# Altium PCB PCB1.PcbDoc (part 2 of 2)
Units mil, origin at the board's own origin, x right, y up, seen from the top; angles counter-clockwise.
Board outline 2495 x 1003.43 mil, 4 copper layers (Top Layer, GND, 3.3V, Bottom Layer), stack 61.581 mil thick; 64 components, 69 nets, 245 pads, 37 vias.
Unrouted connection lines stored in the file: 4.
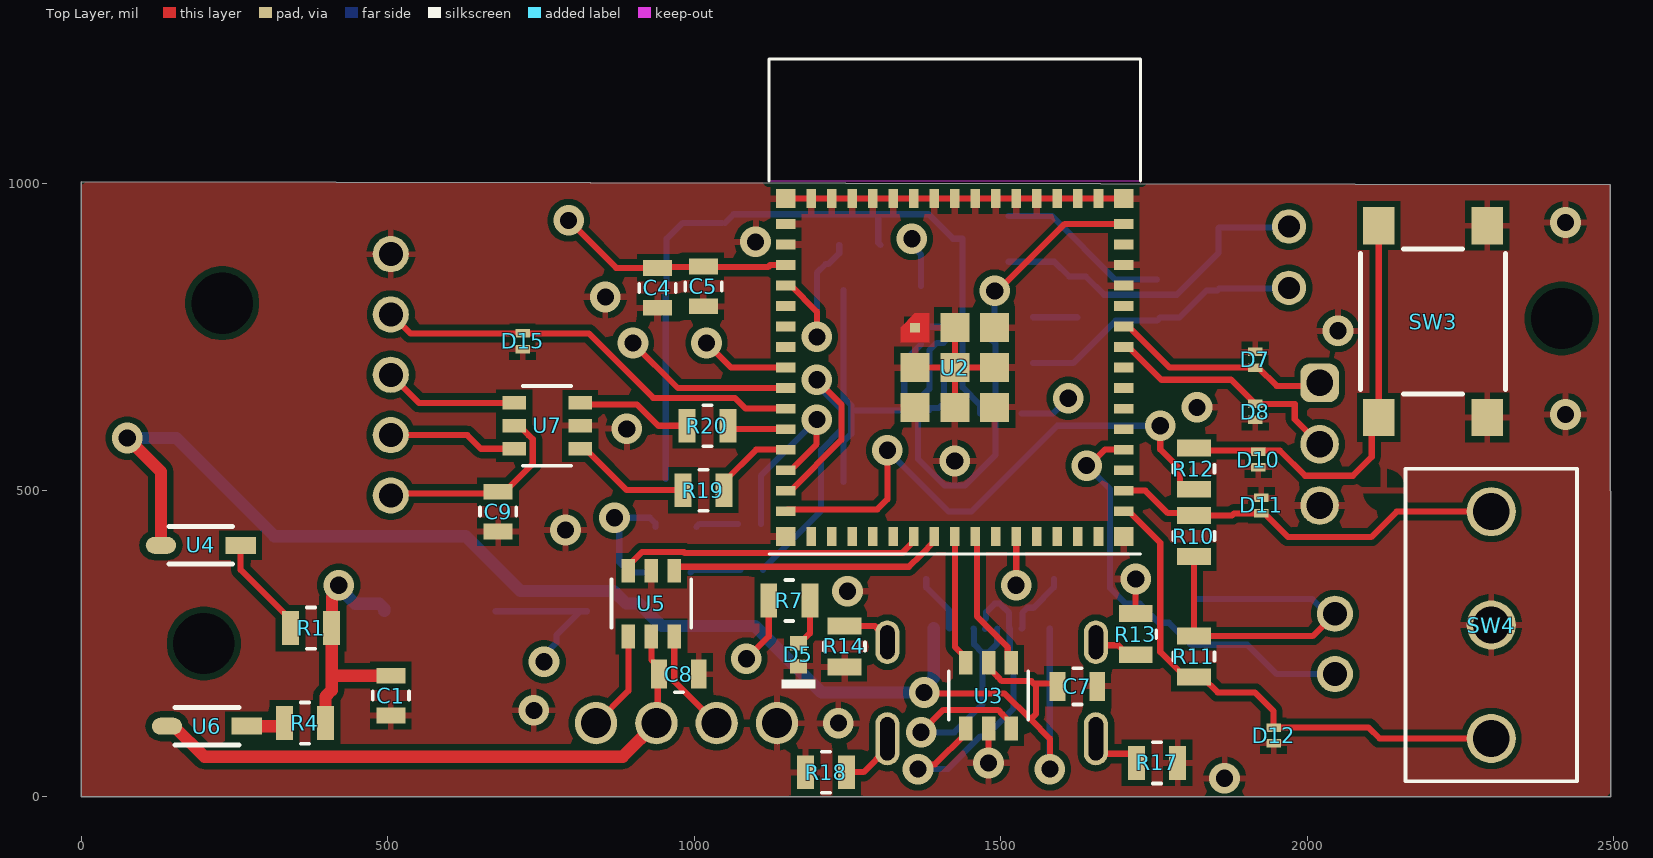
[diagram p0: Top Layer view]

## Part data (continued)
R1 R4 R8 R19 R20: library part RC0805JR-070RL, "GENERAL PURPOSE CHIP RESISTOR Metal Glaze/thick Film, 0.125W, 0ohm, Surface Mount, 0805", Case Code (Imperial)=0805, Manufacturer="Yageo Group", Max Operating Temperature=155°C, Min Operating Temperature=-55°C, Power Dissipation=125mW, Supplier Part Number=311-0.0ARDKR-ND, Temperature Coefficient=300ppm/°C, Tolerance=5%, Voltage Rating=150V, Case/Package=0805, Category="Chip SMD Resistors", China RoHS=Non-Compliant, ComponentLink1Description=https://datasheet.octopart.com:443/RC0805JR-070RL-Yageo-datasheet-182189538.pdf?src-supplier=IHS, ComponentLink1URL=https://datasheet.octopart.com:443/RC0805JR-070RL-Yageo-datasheet-182189538.pdf?src-supplier=IHS, ComponentLink2Description=https://datasheet.octopart.com:443/RC0805JR-070RL-Yageo-datasheet-103092701.pdf?src-supplier=Upverter, ComponentLink2URL=https://datasheet.octopart.com:443/RC0805JR-070RL-Yageo-datasheet-103092701.pdf?src-supplier=Upverter, ComponentLink3Description=https://datasheet.octopart.com:443/RC0805JR-070RL-Yageo-datasheet-98239111.pdf?src-supplier=Upverter, ComponentLink3URL=https://datasheet.octopart.com:443/RC0805JR-070RL-Yageo-datasheet-98239111.pdf?src-supplier=Upverter, ComponentLink4Description=https://datasheet.octopart.com:443/RC0805JR-070RL-Yageo-datasheet-8330313.pdf?src-supplier=Newark, ComponentLink4URL=https://datasheet.octopart.com:443/RC0805JR-070RL-Yageo-datasheet-8330313.pdf?src-supplier=Newark, ComponentLink5Description=https://datasheet.octopart.com:443/RC0805JR-070RL-Yageo-datasheet-8327506.pdf?src-supplier=Newark, ComponentLink5URL=https://datasheet.octopart.com:443/RC0805JR-070RL-Yageo-datasheet-8327506.pdf?src-supplier=Newark, ComponentLink6Description=https://datasheet.octopart.com:443/RC0805JR-070RL-Yageo-datasheet-62067350.pdf?src-supplier=element14+APAC, ComponentLink6URL=https://datasheet.octopart.com:443/RC0805JR-070RL-Yageo-datasheet-62067350.pdf?src-supplier=element14+APAC, ComponentLink7Description=https://datasheet.octopart.com:443/RC0805JR-070RL-Yageo-datasheet-17879891.pdf?src-supplier=element14+APAC, ComponentLink7URL=https://datasheet.octopart.com:443/RC0805JR-070RL-Yageo-datasheet-17879891.pdf?src-supplier=element14+APAC, ComponentLink8Description=https://datasheet.octopart.com:443/RC0805JR-070RL-Yageo-Group-datasheet-176638170.pdf?src-supplier=Future+Electronics, ComponentLink8URL=https://datasheet.octopart.com:443/RC0805JR-070RL-Yageo-Group-datasheet-176638170.pdf?src-supplier=Future+Electronics, ComponentLink9Description=https://datasheet.octopart.com:443/RC0805JR-070RL-Yageo-datasheet-164759695.pdf?src-supplier=Future+Electronics, ComponentLink9URL=https://datasheet.octopart.com:443/RC0805JR-070RL-Yageo-datasheet-164759695.pdf?src-supplier=Future+Electronics, ComponentLink10Description=https://datasheet.octopart.com:443/RC0805JR-070RL-Yageo-datasheet-15800360.pdf?src-supplier=Future+Electronics, ComponentLink10URL=https://datasheet.octopart.com:443/RC0805JR-070RL-Yageo-datasheet-15800360.pdf?src-supplier=Future+Electronics, ComponentLink11Description=https://datasheet.octopart.com:443/RC0805JR-070RL-Yageo-datasheet-12592811.pdf?src-supplier=Future+Electronics, ComponentLink11URL=https://datasheet.octopart.com:443/RC0805JR-070RL-Yageo-datasheet-12592811.pdf?src-supplier=Future+Electronics, ComponentLink12Description=https://datasheet.octopart.com:443/RC0805JR-070RL-Yageo-datasheet-8324252.pdf?src-supplier=Future+Electronics, ComponentLink12URL=https://datasheet.octopart.com:443/RC0805JR-070RL-Yageo-datasheet-8324252.pdf?src-supplier=Future+Electronics, ComponentLink13Description=https://datasheet.octopart.com:443/RC0805JR-070RL-Yageo-datasheet-79472498.pdf?src-supplier=Megastar, ComponentLink13URL=https://datasheet.octopart.com:443/RC0805JR-070RL-Yageo-datasheet-79472498.pdf?src-supplier=Megastar, ComponentLink14Description=https://datasheet.octopart.com/RC0805JR-070RL-Yageo-datasheet-73766026.pdf, ComponentLink14URL=https://datasheet.octopart.com/RC0805JR-070RL-Yageo-datasheet-73766026.pdf, ComponentLink15Description=https://datasheet.octopart.com:443/RC0805JR-070RL-Yageo-datasheet-8377918.pdf?src-supplier=Farnell, ComponentLink15URL=https://datasheet.octopart.com:443/RC0805JR-070RL-Yageo-datasheet-8377918.pdf?src-supplier=Farnell, ComponentLink16Description=https://datasheet.octopart.com:443/RC0805JR-070RL-Yageo-datasheet-118657.pdf?src-supplier=DigiKey, ComponentLink16URL=https://datasheet.octopart.com:443/RC0805JR-070RL-Yageo-datasheet-118657.pdf?src-supplier=DigiKey, ComponentLink17Description=http://sigma.octopart.com:80/conflict_mineral_statement/Yageo-company-3.pdf?src-supplier=Compliance+Statements, ComponentLink17URL=http://sigma.octopart.com:80/conflict_mineral_statement/Yageo-company-3.pdf?src-supplier=Compliance+Statements, ComponentLink18Description=http://sigma.octopart.com:80/rohs_statement/Yageo-company-2.pdf?src-supplier=Compliance+Statements, ComponentLink18URL=http://sigma.octopart.com:80/rohs_statement/Yageo-company-2.pdf?src-supplier=Compliance+Statements, Composition="Thick Film", Contact Plating=Tin, Depth=1.25mm, Height=500µm, Lead Free="Lead Free", Length=2mm, Lifecycle Status=Production, Manufacturer Part Number=RC0805JR-070RL, Military Standard=Not, Mounting Technology="Surface Mount", Number of Terminals=2, Packaging="Tape & Reel", Pins=2, Power Rating=125mW, Pricing="1=0.1, 10=0.015, 25=0.0128, 50=0.011, 100=0.0097, 250=0.00812, 500=0.00716, 1000=0.00633 (USD)", Radiation Hardening=No, REACH SVHC=Yes, RoHS=Compliant, Schedule B="8533290000, 8533290000|8533290000, 8533290000|8533290000|8533290000, 8533290000|8533290000|8533290000|8533290000", Stock=1260777, Supplier=DigiKey, Termination=SMD/SMT, Voltage Rating (DC)=150V, Width=1.25mm
R2 R3 R7: library part RG2012P-102-B-T5, "Res Thin Film 0805 1K Ohm 0.1% 0.125W(1/8W) ±25ppm/C Sulfur Resistant Pad SMD Automotive T/R", Case Code (Imperial)=0805, Case Code (Metric)=2012, Manufacturer=Susumu, Max Operating Temperature=155°C, Max Power Dissipation=125mW, Min Operating Temperature=-55°C, Supplier Part Number=RG20P1.0KBCT-ND, Temperature Coefficient=25ppm/°C, Tolerance=0.1%, Voltage Rating=150V, Case/Package=0805, Category="Chip SMD Resistors", ComponentLink1Description=https://datasheet.octopart.com:443/RG2012P-102-B-T5-Susumu-datasheet-182148308.pdf?src-supplier=IHS, ComponentLink1URL=https://datasheet.octopart.com:443/RG2012P-102-B-T5-Susumu-datasheet-182148308.pdf?src-supplier=IHS, ComponentLink2Description=https://datasheet.octopart.com:443/RG2012P-102-B-T5-Susumu-datasheet-104167497.pdf?src-supplier=Upverter, ComponentLink2URL=https://datasheet.octopart.com:443/RG2012P-102-B-T5-Susumu-datasheet-104167497.pdf?src-supplier=Upverter, ComponentLink3Description=https://datasheet.octopart.com:443/RG2012P-102-B-T5-Susumu-datasheet-62085167.pdf?src-supplier=Upverter, ComponentLink3URL=https://datasheet.octopart.com:443/RG2012P-102-B-T5-Susumu-datasheet-62085167.pdf?src-supplier=Upverter, ComponentLink4Description=https://datasheet.octopart.com/RG2012P-102-B-T5-Susumu-datasheet-12509734.pdf, ComponentLink4URL=https://datasheet.octopart.com/RG2012P-102-B-T5-Susumu-datasheet-12509734.pdf, ComponentLink5Description=https://datasheet.octopart.com:443/RG2012P-102-B-T5-Susumu-datasheet-12510102.pdf?src-supplier=Future+Electronics, ComponentLink5URL=https://datasheet.octopart.com:443/RG2012P-102-B-T5-Susumu-datasheet-12510102.pdf?src-supplier=Future+Electronics, ComponentLink6Description=https://datasheet.octopart.com:443/RG2012P-102-B-T5-Susumu-datasheet-12510050.pdf?src-supplier=Future+Electronics, ComponentLink6URL=https://datasheet.octopart.com:443/RG2012P-102-B-T5-Susumu-datasheet-12510050.pdf?src-supplier=Future+Electronics, ComponentLink7Description=https://datasheet.octopart.com:443/RG2012P-102-B-T5-Susumu-datasheet-8324184.pdf?src-supplier=Future+Electronics, ComponentLink7URL=https://datasheet.octopart.com:443/RG2012P-102-B-T5-Susumu-datasheet-8324184.pdf?src-supplier=Future+Electronics, ComponentLink8Description=https://datasheet.octopart.com:443/RG2012P-102-B-T5-Susumu-datasheet-118552.pdf?src-supplier=DigiKey, ComponentLink8URL=https://datasheet.octopart.com:443/RG2012P-102-B-T5-Susumu-datasheet-118552.pdf?src-supplier=DigiKey, Composition="Thin Film", Country of Origin="Mainland China, Japan", Export Control Classification Number (ECCN) Code=EAR99, Features="Automotive AEC-Q200", Harmonized Tariff Schedule (HTS) Code=8533.21.00.30, Height=400µm, Introduction Date=2006-03-30, Lead Free="Lead Free", Length=2.0066mm, Lifecycle Status=Production, Manufacturer Part Number=RG2012P-102-B-T5, Mounting Technology="Surface Mount", Number of Terminals=2, Number of Terminations=2, Power Dissipation=125mW, Power Rating=125mW, Pricing="1=0.1, 10=0.069, 25=0.0644, 50=0.0608, 100=0.0574, 250=0.05324, 500=0.05038, 1000=0.04774 (USD)", REACH SVHC=Yes, RoHS=Compliant, Stock=185368, Supplier=DigiKey, Termination=SMD/SMT, Voltage Rating (DC)=150V, Width=1.25mm, Working Voltage=150V
R5 R6 R9 R10 R11 R21: library part RG2012P-103-B-T5, "Res Thin Film 0805 10K Ohm 0.1% 0.125W(1/8W) ±25ppm/C Sulfur Resistant Pad SMD Automotive T/R", Case Code (Imperial)=0805, Case Code (Metric)=2012, Manufacturer=Susumu, Max Operating Temperature=155°C, Min Operating Temperature=-55°C, Power Dissipation=125mW, Supplier Part Number=RG20P10.0KBCT-ND, Temperature Coefficient=25ppm/°C, Tolerance=0.1%, Voltage Rating=150V, Case/Package=0805, Category="Chip SMD Resistors", ComponentLink1Description=https://datasheet.octopart.com:443/RG2012P-103-B-T5-Susumu-datasheet-182148308.pdf?src-supplier=IHS, ComponentLink1URL=https://datasheet.octopart.com:443/RG2012P-103-B-T5-Susumu-datasheet-182148308.pdf?src-supplier=IHS, ComponentLink2Description=https://datasheet.octopart.com:443/RG2012P-103-B-T5-Susumu-datasheet-104167497.pdf?src-supplier=Upverter, ComponentLink2URL=https://datasheet.octopart.com:443/RG2012P-103-B-T5-Susumu-datasheet-104167497.pdf?src-supplier=Upverter, ComponentLink3Description=https://datasheet.octopart.com:443/RG2012P-103-B-T5-Susumu-datasheet-62085167.pdf?src-supplier=Upverter, ComponentLink3URL=https://datasheet.octopart.com:443/RG2012P-103-B-T5-Susumu-datasheet-62085167.pdf?src-supplier=Upverter, ComponentLink4Description=https://datasheet.octopart.com/RG2012P-103-B-T5-Susumu-datasheet-12509734.pdf, ComponentLink4URL=https://datasheet.octopart.com/RG2012P-103-B-T5-Susumu-datasheet-12509734.pdf, ComponentLink5Description=https://datasheet.octopart.com:443/RG2012P-103-B-T5-Susumu-datasheet-80324142.pdf?src-supplier=LKR, ComponentLink5URL=https://datasheet.octopart.com:443/RG2012P-103-B-T5-Susumu-datasheet-80324142.pdf?src-supplier=LKR, ComponentLink6Description=https://datasheet.octopart.com:443/RG2012P-103-B-T5-Susumu-datasheet-12510102.pdf?src-supplier=Future+Electronics, ComponentLink6URL=https://datasheet.octopart.com:443/RG2012P-103-B-T5-Susumu-datasheet-12510102.pdf?src-supplier=Future+Electronics, ComponentLink7Description=https://datasheet.octopart.com:443/RG2012P-103-B-T5-Susumu-datasheet-12510050.pdf?src-supplier=Future+Electronics, ComponentLink7URL=https://datasheet.octopart.com:443/RG2012P-103-B-T5-Susumu-datasheet-12510050.pdf?src-supplier=Future+Electronics, ComponentLink8Description=https://datasheet.octopart.com:443/RG2012P-103-B-T5-Susumu-datasheet-8324184.pdf?src-supplier=Future+Electronics, ComponentLink8URL=https://datasheet.octopart.com:443/RG2012P-103-B-T5-Susumu-datasheet-8324184.pdf?src-supplier=Future+Electronics, ComponentLink9Description=https://datasheet.octopart.com:443/RG2012P-103-B-T5-Susumu-datasheet-118552.pdf?src-supplier=DigiKey, ComponentLink9URL=https://datasheet.octopart.com:443/RG2012P-103-B-T5-Susumu-datasheet-118552.pdf?src-supplier=DigiKey, Composition="Thin Film", Country of Origin="Mainland China, Japan", Export Control Classification Number (ECCN) Code=EAR99, Harmonized Tariff Schedule (HTS) Code=8533.21.00.30, Height=400µm, Introduction Date=2006-03-30, Lead Free="Lead Free", Length=2mm, Lifecycle Status=Production, Manufacturer Part Number=RG2012P-103-B-T5, Mounting Technology="Surface Mount", Number of Terminals=2, Number of Terminations=2, Power Rating=125mW, Pricing="1=0.1, 10=0.069, 25=0.0644, 50=0.0608, 100=0.0574, 250=0.05324, 500=0.05038, 1000=0.04774 (USD)", REACH SVHC=Yes, RoHS=Compliant, Stock=143311, Supplier=DigiKey, Termination=SMD/SMT, Voltage Rating (DC)=150V, Width=1.25mm, Working Voltage=150V
R12: library part RG2012Q-270-D-T5, "Fixed Resistor, Thin Film, 0.125W, 27ohm, 150V, 0.5% +/-Tol, 50ppm/Cel, Surface Mount, 0805", Case Code (Imperial)=0805, Case Code (Metric)=2012, Manufacturer=Susumu, Max Operating Temperature=155°C, Min Operating Temperature=-55°C, Power Dissipation=125mW, Supplier Part Number=408-RG2012Q-270-D-T5CT-ND, Temperature Coefficient=50ppm/°C, Tolerance=0.5%, Voltage Rating=150V, Case/Package=0805, Category="Chip SMD Resistors", ComponentLink1Description=https://datasheet.octopart.com:443/RG2012Q-270-D-T5-Susumu-datasheet-182148308.pdf?src-supplier=IHS, ComponentLink1URL=https://datasheet.octopart.com:443/RG2012Q-270-D-T5-Susumu-datasheet-182148308.pdf?src-supplier=IHS, ComponentLink2Description=https://datasheet.octopart.com:443/RG2012Q-270-D-T5-Susumu-datasheet-104167497.pdf?src-supplier=Upverter, ComponentLink2URL=https://datasheet.octopart.com:443/RG2012Q-270-D-T5-Susumu-datasheet-104167497.pdf?src-supplier=Upverter, ComponentLink3Description=https://datasheet.octopart.com:443/RG2012Q-270-D-T5-Susumu-datasheet-62085167.pdf?src-supplier=Future+Electronics, ComponentLink3URL=https://datasheet.octopart.com:443/RG2012Q-270-D-T5-Susumu-datasheet-62085167.pdf?src-supplier=Future+Electronics, ComponentLink4Description=https://datasheet.octopart.com:443/RG2012Q-270-D-T5-Susumu-datasheet-12510102.pdf?src-supplier=Future+Electronics, ComponentLink4URL=https://datasheet.octopart.com:443/RG2012Q-270-D-T5-Susumu-datasheet-12510102.pdf?src-supplier=Future+Electronics, ComponentLink5Description=https://datasheet.octopart.com:443/RG2012Q-270-D-T5-Susumu-datasheet-12510050.pdf?src-supplier=Future+Electronics, ComponentLink5URL=https://datasheet.octopart.com:443/RG2012Q-270-D-T5-Susumu-datasheet-12510050.pdf?src-supplier=Future+Electronics, ComponentLink6Description=https://datasheet.octopart.com/RG2012Q-270-D-T5-Susumu-datasheet-12509734.pdf, ComponentLink6URL=https://datasheet.octopart.com/RG2012Q-270-D-T5-Susumu-datasheet-12509734.pdf, Composition="Thin Film", Country of Origin="Mainland China, Japan", Export Control Classification Number (ECCN) Code=EAR99, Harmonized Tariff Schedule (HTS) Code=8533.21.00.30, Height=400µm, Introduction Date=2006-03-30, Lead Free="Lead Free", Length=2mm, Lifecycle Status=Production, Manufacturer Part Number=RG2012Q-270-D-T5, Mounting Technology="Surface Mount", Number of Terminals=2, Packaging="Tape & Reel (TR)", Power Rating=125mW, Pricing="1=0.1, 10=0.055, 25=0.0508, 50=0.048, 100=0.0453, 250=0.04204, 500=0.03978, 1000=0.03768 (USD)", REACH SVHC=Yes, RoHS=Compliant, Stock=8968, Supplier=DigiKey, Termination=SMD/SMT, Voltage Rating (DC)=150V, Width=1.25mm, Working Voltage=150V
R13 R14 R17 R18: library part RG2012P-105-B-T5, "Res Thin Film 0805 1M Ohm 0.1% 0.125W(1/8W) ±25ppm/C Sulfur Resistant Pad SMD Automotive T/R", Case Code (Imperial)=0805, Case Code (Metric)=2012, Manufacturer=Susumu, Max Operating Temperature=155°C, Min Operating Temperature=-55°C, Power Dissipation=125mW, Supplier Part Number=408-RG2012P-105-B-T5CT-ND, Temperature Coefficient=25ppm/°C, Tolerance=0.1%, Voltage Rating=150V, Case/Package=0805, Category="Chip SMD Resistors", ComponentLink1Description=https://datasheet.octopart.com:443/RG2012P-105-B-T5-Susumu-datasheet-182148308.pdf?src-supplier=IHS, ComponentLink1URL=https://datasheet.octopart.com:443/RG2012P-105-B-T5-Susumu-datasheet-182148308.pdf?src-supplier=IHS, ComponentLink2Description=https://datasheet.octopart.com:443/RG2012P-105-B-T5-Susumu-datasheet-104167497.pdf?src-supplier=Upverter, ComponentLink2URL=https://datasheet.octopart.com:443/RG2012P-105-B-T5-Susumu-datasheet-104167497.pdf?src-supplier=Upverter, ComponentLink3Description=https://datasheet.octopart.com:443/RG2012P-105-B-T5-Susumu-datasheet-68296037.pdf?src-supplier=Future+Electronics, ComponentLink3URL=https://datasheet.octopart.com:443/RG2012P-105-B-T5-Susumu-datasheet-68296037.pdf?src-supplier=Future+Electronics, ComponentLink4Description=https://datasheet.octopart.com:443/RG2012P-105-B-T5-Susumu-datasheet-12510050.pdf?src-supplier=Future+Electronics, ComponentLink4URL=https://datasheet.octopart.com:443/RG2012P-105-B-T5-Susumu-datasheet-12510050.pdf?src-supplier=Future+Electronics, ComponentLink5Description=https://datasheet.octopart.com/RG2012P-105-B-T5-Susumu-datasheet-12509734.pdf, ComponentLink5URL=https://datasheet.octopart.com/RG2012P-105-B-T5-Susumu-datasheet-12509734.pdf, Composition="Thin Film", Country of Origin="Mainland China, Japan", Export Control Classification Number (ECCN) Code=EAR99, Harmonized Tariff Schedule (HTS) Code=8533.21.00.30, Height=400µm, Introduction Date=2006-03-30, Lead Free="Lead Free", Length=2mm, Lifecycle Status=Production, Manufacturer Part Number=RG2012P-105-B-T5, Mounting Technology="Surface Mount", Number of Terminals=2, Power Rating=125mW, Pricing="1=0.1, 10=0.077, 25=0.0712, 50=0.0672, 100=0.0635, 250=0.05896, 500=0.0558, 1000=0.0529 (USD)", REACH SVHC=Yes, RoHS=Compliant, Stock=192478, Supplier=DigiKey, Termination=SMD/SMT, Voltage Rating (DC)=150V, Width=1.25mm, Working Voltage=150V
R15 R16: library part RG2012P-512-B-T5, "Res Thin Film 0805 5.1K Ohm 0.1% 0.125W(1/8W) ±25ppm/C Sulfur Resistant Pad SMD Automotive T/R", Case Code (Imperial)=0805, Case Code (Metric)=2012, Manufacturer=Susumu, Max Operating Temperature=155°C, Max Power Dissipation=125mW, Min Operating Temperature=-55°C, Supplier Part Number=RG20P5.1KBDKR-ND, Temperature Coefficient=25ppm/°C, Tolerance=0.1%, Voltage Rating=150V, Case/Package=0805, Category="Chip SMD Resistors", ComponentLink1Description=https://datasheet.octopart.com:443/RG2012P-512-B-T5-Susumu-datasheet-182148308.pdf?src-supplier=IHS, ComponentLink1URL=https://datasheet.octopart.com:443/RG2012P-512-B-T5-Susumu-datasheet-182148308.pdf?src-supplier=IHS, ComponentLink2Description=https://datasheet.octopart.com:443/RG2012P-512-B-T5-Susumu-datasheet-104167497.pdf?src-supplier=Upverter, ComponentLink2URL=https://datasheet.octopart.com:443/RG2012P-512-B-T5-Susumu-datasheet-104167497.pdf?src-supplier=Upverter, ComponentLink3Description=https://datasheet.octopart.com:443/RG2012P-512-B-T5-Susumu-datasheet-12510102.pdf?src-supplier=Future+Electronics, ComponentLink3URL=https://datasheet.octopart.com:443/RG2012P-512-B-T5-Susumu-datasheet-12510102.pdf?src-supplier=Future+Electronics, ComponentLink4Description=https://datasheet.octopart.com:443/RG2012P-512-B-T5-Susumu-datasheet-12510050.pdf?src-supplier=Future+Electronics, ComponentLink4URL=https://datasheet.octopart.com:443/RG2012P-512-B-T5-Susumu-datasheet-12510050.pdf?src-supplier=Future+Electronics, ComponentLink5Description=https://datasheet.octopart.com/RG2012P-512-B-T5-Susumu-datasheet-12509734.pdf, ComponentLink5URL=https://datasheet.octopart.com/RG2012P-512-B-T5-Susumu-datasheet-12509734.pdf, ComponentLink6Description=https://datasheet.octopart.com:443/RG2012P-512-B-T5-Susumu-datasheet-118552.pdf?src-supplier=DigiKey, ComponentLink6URL=https://datasheet.octopart.com:443/RG2012P-512-B-T5-Susumu-datasheet-118552.pdf?src-supplier=DigiKey, Composition="Thin Film", Features="Automotive AEC-Q200", Height=400µm, Lead Free="Lead Free", Length=2.0066mm, Lifecycle Status=Production, Manufacturer Part Number=RG2012P-512-B-T5, Mounting Technology="Surface Mount", Number of Terminals=2, Number of Terminations=2, Power Dissipation=125mW, Power Rating=125mW, Pricing="1=0.12, 10=0.1, 25=0.0928, 50=0.0876, 100=0.0828, 250=0.07684, 500=0.07274, 1000=0.06901 (USD)", REACH SVHC=Yes, RoHS=Compliant, Schedule B="8533210045, 8533210045|8533210045|8533210045|8533210045|8533210045", Stock=18763, Supplier=DigiKey, Termination=SMD/SMT, Voltage Rating (DC)=150V, Width=1.25mm, Working Voltage=150V
SW1 SW2 SW3: "SWITCH TACTILE SPST-NO 0.05A 12V", Contact Current(DC)-Max=50mA, Contact DC Max Rating R Load=0.05A@12VDC, Contact Resistance=0.1mR, Contact Voltage(DC)-Max=12V, Dielectric Withstand Volts=250VACV, Insulation Resistance=100GR, LCSC Part Number=C221869, Manufacturer="ITT C&K", Manufacturer Series=PTS645, Max Operating Temperature=60°C, Min Operating Temperature=-20°C, Supplier Part Number=CKN9085CT-ND, Actuator Type=Pushbutton, Body Breadth=5.9944inch, Body Height=3.4544mm, Body Length or Diameter=5.9944mm, Category="Tactile Switches", ComponentLink1Description=https://datasheet.ciiva.com:443/pdfs/VipMasterIC/IC/CKCI/CKCI-S-A0001796527/CKCI-S-A0001796842-1.pdf?src-supplier=IHS+Markit, ComponentLink1URL=https://datasheet.ciiva.com:443/pdfs/VipMasterIC/IC/CKCI/CKCI-S-A0001796527/CKCI-S-A0001796842-1.pdf?src-supplier=IHS+Markit, ComponentLink2Description=https://datasheet.ciiva.com/29903/getdatasheetpartid-773702-29903807.pdf?src-supplier=Verical, ComponentLink2URL=https://datasheet.ciiva.com/29903/getdatasheetpartid-773702-29903807.pdf?src-supplier=Verical, ComponentLink3Description=https://datasheet.ciiva.com/14920/pts645-14920741.pdf?src-supplier=Digikey, ComponentLink3URL=https://datasheet.ciiva.com/14920/pts645-14920741.pdf?src-supplier=Digikey, ComponentLink4Description=https://datasheet.ciiva.com/22637/1707731-22637356.pdf?src-supplier=Element14, ComponentLink4URL=https://datasheet.ciiva.com/22637/1707731-22637356.pdf?src-supplier=Element14, Electrical Life=100000Cycles, JESD-609 Code=e4, Manufacturer Part Number=PTS645SH50SMTR92LFS, Mounting Technology="Surface Mount", PCB Hole Count=4, Pricing="1=0.35, 10=0.337, 25=0.3172, 100=0.2753, 250=0.24972, 500=0.2323 (USD)", Reach SVHC Compliant=Yes, RoHS=Yes, RoHS Compliant=Yes, Stock=64637, Supplier=Digikey, Switch Action=MOMENTARY, Switch Function=SPST, Switch Type=Keypad, Terminal Finish=Silver, Terminal Length=0.138inch, Termination=Solder
SW4: "Switch Toggle ON None ON SPDT Round Lever PC Pins 5A 250VAC 28VDC PC Mount", Contact Current Rating=5A, Contact Voltage Rating (AC)=120V, Manufacturer=E-Switch, Max Operating Temperature=85°C, Max Voltage Rating (DC)=28V, Min Operating Temperature=-30°C, Supplier Part Number=EG2355-ND, Actuator Length=10.414mm, Actuator Material="Brass, Chrome", Category="Toggle Switches", ComponentLink1Description=https://datasheet.octopart.com:443/100SP1T1B4M2QE-E-Switch-datasheet-17722722.pdf?src-supplier=IHS, ComponentLink1URL=https://datasheet.octopart.com:443/100SP1T1B4M2QE-E-Switch-datasheet-17722722.pdf?src-supplier=IHS, ComponentLink2Description=https://datasheet.octopart.com:443/100SP1T1B4M2QE-E-Switch-datasheet-112052116.pdf?src-supplier=Farnell, ComponentLink2URL=https://datasheet.octopart.com:443/100SP1T1B4M2QE-E-Switch-datasheet-112052116.pdf?src-supplier=Farnell, ComponentLink3Description=https://datasheet.octopart.com:443/100SP1T1B4M2QE-E-Switch-datasheet-178529814.pdf?src-supplier=Future+Electronics, ComponentLink3URL=https://datasheet.octopart.com:443/100SP1T1B4M2QE-E-Switch-datasheet-178529814.pdf?src-supplier=Future+Electronics, ComponentLink4Description=https://datasheet.octopart.com:443/100SP1T1B4M2QE-E-Switch-datasheet-41351065.pdf?src-supplier=element14+APAC, ComponentLink4URL=https://datasheet.octopart.com:443/100SP1T1B4M2QE-E-Switch-datasheet-41351065.pdf?src-supplier=element14+APAC, ComponentLink5Description=https://datasheet.octopart.com:443/100SP1T1B4M2QE-E-Switch-datasheet-501321.pdf?src-supplier=Newark, ComponentLink5URL=https://datasheet.octopart.com:443/100SP1T1B4M2QE-E-Switch-datasheet-501321.pdf?src-supplier=Newark, Contact Plating=Silver, Country of Origin="Mainland China", Current Rating=5A, Electrical Life=50kcycles, Export Control Classification Number (ECCN) Code=EAR99, Harmonized Tariff Schedule (HTS) Code=8536.50.70.00, Height=8.89mm, Illumination Type="Illuminated, Non-Illuminated", Introduction Date=2011-01-05, Lead Free="Lead Free", Length=12.7mm, Lifecycle Status=Production, Manufacturer Part Number=100SP1T1B4M2QE, Max Current Rating=5A, Mounting Technology="Through Hole", Number of Positions=2, Orientation=Vertical, Pricing="1=2.63, 10=2.272, 25=2.1428, 50=2.05, 108=1.9513, 324=1.81836, 540=1.75957, 1080=1.68271 (USD)", REACH SVHC=Yes, RoHS=Compliant, Sealable="EPOXY TERMINAL SEALED", Stock=13324, Supplier=DigiKey, Switch Function=On-On, Termination="PC Pin", Throw Configuration=SPDT, Voltage Rating (AC)=120V, Voltage Rating (DC)=28V
U1: "IC REG LINEAR 3.3V 1.5A SOT223-4", Case/Package=SOP, Dropout Voltage1-Max=550mV, Dropout Voltage1-Nom=340mV, Input Voltage Absolute-Max=20V, LCSC Part Number=C181262, Manufacturer="Texas Instruments", Min Input Voltage=3.8V, Operating Temperature, TJ-Max=125°C, Operating Temperature, TJ-Min=-40°C, Output Current1-Max=1.5A, Output Voltage1-Max=3.4V, Output Voltage1-Min=3.2V, Output Voltage1-Nom=3.3V, Package Body Material=Plastic, Package Shape=Rectangular, Package Style="SMALL OUTLINEMeter", Peak Reflow Temperature (Cel)=260°C, Supplier Part Number=296-24897-1-ND, Voltage Tolerance-Max=3%, Adjustability=FIXED, Category="Voltage Regulators - Linear", Channels=1, ComponentLink1Description=https://www.ti.com:443/lit/ds/symlink/tl1963a.pdf?src-supplier=IHS+Markit, ComponentLink1URL=https://www.ti.com:443/lit/ds/symlink/tl1963a.pdf?src-supplier=IHS+Markit, ComponentLink2Description=https://datasheet.ciiva.com/2046/-2046068.pdf?src-supplier=Digikey, ComponentLink2URL=https://datasheet.ciiva.com/2046/-2046068.pdf?src-supplier=Digikey, Height - Seated (Max)=1.8mm, JESD-30 Code=R-PDSO-G4, JESD-609 Code=e3, Length=6.5mm, Line Regulation-Max=0.01%, Load Regulation-Max=0.07%, Manufacturer Part Number=TL1963A-33DCYR, Max Supply Voltage=20V, Moisture Sensitivity Level=2, Number of Outputs=1, Packaging="Tape and Reel", Pins=4, Pricing="1=2.91, 10=2.614, 25=2.4712, 100=2.1417, 250=2.03188, 500=1.8232, 1000=1.53764 (USD)", Qualification Status="Not Qualified", Reach SVHC Compliant=Yes, Regulator Type="FIXED POSITIVE SINGLE OUTPUT LDO REGULATOR", RoHS=Yes, RoHS Compliant=Yes, Stock=4105, Supplier=Digikey, Surface Mount=Yes, Technology=BIPOLAR, Terminal Finish=Tin, Terminal Form="Gull Wing", Terminal Pitch=2.3mm, Terminal Position=DUAL, Width=3.5mm
U2: "SMD Module, ESP32-S3FN8, 8 mb Sp", LCSC Part Number=C2913206, Manufacturer="Espressif Systems", Supplier Part Number=1965-ESP32-S3-MINI-1-N8CT-ND, Category=LDO, Manufacturer Part Number=ESP32-S3-MINI-1-N8, Pricing="1=3.1 (USD)", RoHS=No, Stock=2024, Supplier=Digikey
U3 U5 U7: "17V Clamp 5A (8/20µs) Ipp Tvs Diode Surface Mount SOT-23-6", Breakdown Voltage=6V, Case/Package=SOT-23, Clamping Voltage=17V, Forward Voltage=1.1V, Leakage Current=150nA, Manufacturer=STMicroelectronics, Max Junction Temperature (Tj)=125°C, Max Repetitive Reverse Voltage (Vrrm)=5.25V, Min Operating Temperature=-40°C, Peak Pulse Current=5A, Power Line Protection=Yes, Reverse Standoff Voltage=5V, Supplier Part Number=497-5235-1-ND, Test Current=1mA, Category="TVS Diodes", China RoHS=Compliant, ComponentLink1Description=https://datasheet.octopart.com:443/USBLC6-2SC6-STMicroelectronics-datasheet-10412581.pdf?src-supplier=Newark, ComponentLink1URL=https://datasheet.octopart.com:443/USBLC6-2SC6-STMicroelectronics-datasheet-10412581.pdf?src-supplier=Newark, ComponentLink2Description=https://datasheet.octopart.com:443/USBLC6-2SC6-STMicroelectronics-datasheet-181961833.pdf?src-supplier=Newark, ComponentLink2URL=https://datasheet.octopart.com:443/USBLC6-2SC6-STMicroelectronics-datasheet-181961833.pdf?src-supplier=Newark, ComponentLink3Description=https://datasheet.octopart.com:443/USBLC6-2SC6-STMicroelectronics-datasheet-525477.pdf?src-supplier=Factory+Futures, ComponentLink3URL=https://datasheet.octopart.com:443/USBLC6-2SC6-STMicroelectronics-datasheet-525477.pdf?src-supplier=Factory+Futures, ComponentLink4Description=https://datasheet.octopart.com:443/USBLC6-2SC6-STMicroelectronics-datasheet-82998616.pdf?src-supplier=Farnell, ComponentLink4URL=https://datasheet.octopart.com:443/USBLC6-2SC6-STMicroelectronics-datasheet-82998616.pdf?src-supplier=Farnell, ComponentLink5Description=https://datasheet.octopart.com:443/USBLC6-2SC6-STMicroelectronics-datasheet-46285.pdf?src-supplier=Farnell, ComponentLink5URL=https://datasheet.octopart.com:443/USBLC6-2SC6-STMicroelectronics-datasheet-46285.pdf?src-supplier=Farnell, ComponentLink6Description=https://datasheet.octopart.com:443/USBLC6-2SC6-STMicroelectronics-datasheet-14050643.pdf?src-supplier=iiiC, ComponentLink6URL=https://datasheet.octopart.com:443/USBLC6-2SC6-STMicroelectronics-datasheet-14050643.pdf?src-supplier=iiiC, ComponentLink7Description=https://datasheet.octopart.com:443/USBLC6-2SC6-STMicroelectronics-datasheet-10521292.pdf?src-supplier=Jameco, ComponentLink7URL=https://datasheet.octopart.com:443/USBLC6-2SC6-STMicroelectronics-datasheet-10521292.pdf?src-supplier=Jameco, Contact Plating=Tin, Country of Origin="Mainland China", Data Rate=480Mbps, Depth=1.75mm, Direction=Unidirectional, Element Configuration=Dual, ESD Protection=Yes, Export Control Classification Number (ECCN) Code=EAR99, Harmonized Tariff Schedule (HTS) Code=8541.10.00.50, Height=1.45mm, Introduction Date=2005-03-15, Lead Free="Lead Free", Length=3.05mm, Lifecycle Status=Production, Manufacturer Part Number=USBLC6-2SC6, Max Breakdown Voltage=6V, Max Operating Temperature=125°C, Max Reverse Leakage Current=150nA, Min Breakdown Voltage=6V, Mounting Technology="Surface Mount", Number of Bidirectional Channels=2, Number of Channels=2, Number of Elements=1, Number of Terminals=6, Operating Supply Voltage=1.1V, Peak Reverse Current=150nA, Pins=6, Polarity=Unidirectional, Pricing="1=0.36, 10=0.243, 100=0.163, 500=0.127, 1000=0.114, 3000=0.077, 6000=0.076, 9000=0.075 (USD)", Radiation Hardening=No, REACH SVHC=Yes, Reverse Breakdown Voltage=6V, RoHS=Compliant, Schedule B="8536300000, 8536300000|8536300000|8536300000|8536300000|8536300000|8536300000|8536300000|8536300000|8536300000|8536300000|8536300000|8536300000|8536300000|8536300000|8536300000|8536300000|8536300000|8536300000|8536300000|8536300000|8536300000|8536300000|8536300000|85", Stock=229189, Supplier=DigiKey, Termination=SMD/SMT, Width=1.75mm, Working Voltage=5V
U4 U6: "DIODE SCHOTTKY 40V 1A SOD123", Average Rectified Current=1A, Case/Package=SOD-123-2, Forward Voltage=750mV, Manufacturer="Diodes Inc.", Max Forward Surge Current (Ifsm)=25A, Max Junction Temperature (Tj)=125°C, Max Power Dissipation=450mW, Max Repetitive Reverse Voltage (Vrrm)=40V, Min Operating Temperature=-65°C, Peak Reverse Current=1mA, Supplier Part Number=1N5819HW-FDICT-ND, Category="Schottky Diodes", China RoHS=Compliant, ComponentLink1Description=https://datasheet.octopart.com:443/1N5819HW-7-F-Diodes-Inc.-datasheet-180549196.pdf?src-supplier=IHS, ComponentLink1URL=https://datasheet.octopart.com:443/1N5819HW-7-F-Diodes-Inc.-datasheet-180549196.pdf?src-supplier=IHS, ComponentLink2Description=https://datasheet.octopart.com:443/1N5819HW-7-F-Diodes-Inc.-datasheet-8332965.pdf?src-supplier=Upverter, ComponentLink2URL=https://datasheet.octopart.com:443/1N5819HW-7-F-Diodes-Inc.-datasheet-8332965.pdf?src-supplier=Upverter, ComponentLink3Description=https://sigma.octopart.com:443/138895985/technical_drawing/Diodes-Inc.-1N5819HW-7-F.pdf?src-supplier=Upverter, ComponentLink3URL=https://sigma.octopart.com:443/138895985/technical_drawing/Diodes-Inc.-1N5819HW-7-F.pdf?src-supplier=Upverter, ComponentLink4Description=https://datasheet.octopart.com:443/1N5819HW-7-F-Diodes-Inc.-datasheet-134530231.pdf?src-supplier=Future+Electronics, ComponentLink4URL=https://datasheet.octopart.com:443/1N5819HW-7-F-Diodes-Inc.-datasheet-134530231.pdf?src-supplier=Future+Electronics, ComponentLink5Description=https://datasheet.octopart.com:443/1N5819HW-7-F-Diodes-Inc.-datasheet-34441420.pdf?src-supplier=Future+Electronics, ComponentLink5URL=https://datasheet.octopart.com:443/1N5819HW-7-F-Diodes-Inc.-datasheet-34441420.pdf?src-supplier=Future+Electronics, ComponentLink6Description=https://datasheet.octopart.com:443/1N5819HW-7-F-Diodes-Inc.-datasheet-10497210.pdf?src-supplier=Future+Electronics, ComponentLink6URL=https://datasheet.octopart.com:443/1N5819HW-7-F-Diodes-Inc.-datasheet-10497210.pdf?src-supplier=Future+Electronics, ComponentLink7Description=https://datasheet.octopart.com:443/1N5819HW-7-F-Diodes-Inc.-datasheet-169364014.pdf?src-supplier=Newark, ComponentLink7URL=https://datasheet.octopart.com:443/1N5819HW-7-F-Diodes-Inc.-datasheet-169364014.pdf?src-supplier=Newark, ComponentLink8Description=https://datasheet.octopart.com:443/1N5819HW-7-F-Diodes-Inc.-datasheet-78715396.pdf?src-supplier=Newark, ComponentLink8URL=https://datasheet.octopart.com:443/1N5819HW-7-F-Diodes-Inc.-datasheet-78715396.pdf?src-supplier=Newark, ComponentLink9Description=https://datasheet.octopart.com:443/1N5819HW-7-F-Diodes-Inc.-datasheet-14053419.pdf?src-supplier=iiiC, ComponentLink9URL=https://datasheet.octopart.com:443/1N5819HW-7-F-Diodes-Inc.-datasheet-14053419.pdf?src-supplier=iiiC, ComponentLink10Description=https://datasheet.octopart.com:443/1N5819HW-7-F-Diodes-Inc.-datasheet-7274306.pdf?src-supplier=Jameco, ComponentLink10URL=https://datasheet.octopart.com:443/1N5819HW-7-F-Diodes-Inc.-datasheet-7274306.pdf?src-supplier=Jameco, ComponentLink11Description=https://datasheet.octopart.com:443/1N5819HW-7-F-Diodes-Inc.-datasheet-16627.pdf?src-supplier=Mouser, ComponentLink11URL=https://datasheet.octopart.com:443/1N5819HW-7-F-Diodes-Inc.-datasheet-16627.pdf?src-supplier=Mouser, ComponentLink12Description=https://datasheet.octopart.com:443/1N5819HW-7-F-Diodes-Inc.-datasheet-145195.pdf?src-supplier=DigiKey, ComponentLink12URL=https://datasheet.octopart.com:443/1N5819HW-7-F-Diodes-Inc.-datasheet-145195.pdf?src-supplier=DigiKey, ComponentLink13Description=http://sigma.octopart.com:80/15616867/materials_sheet/Diodes-Inc.-1N5819HW-7-F.pdf?src-supplier=Compliance+Statements, ComponentLink13URL=http://sigma.octopart.com:80/15616867/materials_sheet/Diodes-Inc.-1N5819HW-7-F.pdf?src-supplier=Compliance+Statements, Contact Plating=Tin, Current Rating=1A, Element Configuration=Single, Forward Current=1A, Height=1.45mm, Lead Free="Lead Free", Length=2.85mm, Lifecycle Status=Production, Manufacturer Part Number=1N5819HW-7-F, Max Operating Temperature=125°C, Max Output current=1A, Max Reverse Voltage (DC)=40V, Min Breakdown Voltage=40V, Number of Elements=1, Number of Terminals=2, Output Current=1A, Packaging="Tape and Reel", Peak Non-Repetitive Surge Current=25A, Pins=2, Polarity=Standard, Pricing="1=0.29, 10=0.166, 100=0.1036, 500=0.07624, 1000=0.06736, 3000=0.0505, 6000=0.044, 9000=0.03923, 15000=0.039, 21000=0.03886, 30000=0.03872, 75000=0.03561, 150000=0.0323 (USD)", Radiation Hardening=No, REACH SVHC=Yes, Reverse Standoff Voltage=40V, Reverse Voltage=40V, RoHS=Compliant, Schedule B="8541100080, 8541100080|8541100080|8541100080|8541100080|8541100080", Stock=184558, Supplier=DigiKey, Termination=SMD/SMT, Voltage Rating (DC)=40V, Weight=10.007382mg, Width=1.7mm

## Free pads (board coordinates)
  round 60 hole 100: 2(200,250) 2(230,805) 2(2415,780)

## Via types
v1: diameter 50, hole 28, Top Layer to Bottom Layer, 37 vias

## Nets (pads, with @x,y where several pads share a name; then routed paths per layer and width w, separated by ;. In a path a pad name is that pad's centre, name@x,y a point inside that pad or via, vN(x,y) a via of type N, cw(c..) or ccw(c..) an arc to the next point about the centre after c; other vN are vias at no path point)
3.3V: C2.2 C3.2 C4.2 C5.2 C9.2 D13.2 J5.2 J6.5 R2.2 R3.2 R7.2 R9.2 R10.2 R11.2 R12.2 R21.2 U1.3 U2.3 U2.15 U7.5 | length 3012.3
  Top Layer w10: J6.5 508.09,494.39 676.91,494.39 C9.2 690.83,497.48 736.5,543.15 736.5,583.15 730.06,589.6 729.9,589.6 714.5,605 U7.5 ; v1(795,940) 872.52,862.48 C4.2 941.24,863.72 1120.29,863.72 1123.89,867.32 U2.3 ; v1(1085,225) 1121.5,261.5 R7.2 ; U2.15 1152.28,468.62 1298.62,468.62 1315,485 v1(1315,565) ; v1(1760,605) 1760,566.59 1792.46,534.13 1792.46,510.31 1801.27,501.5 R12.2 ; R10.2 R11.2 2008.57,261.99 J5.2
  Bottom Layer w10: U1.3 676.06,302.52 C2.2@814.17,302.52 ; v1(755,220) 755,230.82 775.15,250.97 775.15,263.49 C2.2@814.17,302.52 ; C2.2 C2.2@814.17,302.52 ; R3.2 894.25,365.75 877.65,382.35 877.65,447.35 v1(870,455) 927.69,455 936.5,446.19 R2.2 ; v1(1315,565) 1415,465 1452.09,465 1592.09,605 v1(1760,605) ; v1(1355,910) 1355,899.18 1370,884.18 R9.2 ; R21.2 1585,625 v1(1610,650) ; D13.2 2007.96,322.2 2031.74,298.43 J5.2
+5V_VBUS: C7.2 J3.A4B9 J3.B4A9 U3.5 U4.2 | length 2493.8
  Top Layer w10: v1(1375,170) 1376.5,168.5 1505.96,168.5 1548.48,125.98 ; U3.5 1480,210.5 1494.77,195.73 1494.77,195.57 1501.85,188.5 1549.72,188.5 1553.62,184.6 ; v1(1580,45) 1580,94.46 1548.48,125.98 ; C7.2 1587.92,184.6 1553.62,184.6 ; 1548.48,125.98 1557.52,135.02 1557.52,180.7 1553.62,184.6
  Top Layer w20: v1(75,585) 130.02,529.98 U4.2
  Bottom Layer w10: J3.A4B9 1579.74,274.35 1579.74,45.26 v1(1580,45)
  Bottom Layer w20: v1(75,585) 155,585 315,425 627.07,425 698.59,353.48 698.75,353.48 716.61,335.63 868.31,335.63 888.93,315 910,315 946.51,278.49 1098.9,278.49 1207.38,170 v1(1375,170) 1375,178.12 1390.51,193.63 J3.B4A9
BTN_GPIO0: D9.2 Q2.3 R8.1 R21.1 SW2.1 SW2.2 | length 1251.3
  Bottom Layer w10: SW2.1 SW2.2 955,832.91 955,910 980.59,935.59 D9.2 ; D9.2@1049.84,935.59 1064.25,950 1300,950 ; R8.1 1300,903.5 1300,950 ; R21.1 1466.5,638.73 1437.58,667.66 Q2.3 1422.12,910 1382.12,950 1300,950
CHIP_PU: C6.2 D6.2 Q1.3 R9.1 SW1.1 SW1.2 U2.45 | length 1558.2
  Top Layer w10: v1(1490,825) 1495.42,825 1604.67,934.25 U2.45
  Bottom Layer w10: SW1.1 1243.58,579.39 1256,591.8 1256,630 ; SW1.2 1243.58,650.61 1256,638.2 1256,630 ; R9.1@1370,762.4 1370,737.69 1350.93,718.62 1350.32,718.62 1342.52,710.83 1342.52,649.61 1357.2,634.92 D6.2 1256,630 ; R9.1 1412.54,766.5 1418.4,760.65 1418.4,752.36 1406.31,740.27 1395.78,740.27 1383.68,728.18 1383.68,665.15 1364.91,646.37 1364.91,551.05 1408.43,507.52 1441.57,507.52 1491.31,557.27 1491.31,739.21 1485.53,745 1484.21,745 1490,750.79 v1(1490,825)
DTR_FTDI: D3.2 J1.1 Q2.2 R5.1 | length 549.8
  Bottom Layer w10: Q2.2 1587.17,872.6 1611.27,848.5 1638.73,848.5 1668.54,818.68 1787.1,818.68 1855,886.59 D3.2 1856.4,928.6 1968.6,928.6 J1.1
GND: C1.1 C2.1 C3.1 C4.1 C5.1 C6.1 C7.1 C8.1 C9.1 D3.1 D4.1 D5.1 D6.1 D7.1 D8.1 D9.1 D10.1 D11.1 D12.1 D13.1 D14.1 D15.1 J2.3 J3.A1B12 J3.B1A12 J4.4 J6.1 R13.2 R14.2 R15.1 R16.1 R17.2 R18.2 SW1.3 SW1.4 SW2.3 SW2.4 SW3.3 SW3.4 SW4.2 U1.2 U1.4 U2.1 U2.2 U2.42 U2.43 U2.46 U2.47 U2.48 U2.49 U2.50 U2.51 U2.52 U2.53 U2.54 U2.55 U2.56 U2.57 U2.58 U2.59 U2.60 U2.61 U2.62 U2.63 U2.64 U2.65 U2.66 U2.67 U2.68 U2.69 U2.70 U2.71 U2.72 U2.73 U3.2 U5.2 U7.2 | length 1012.2
  Top Layer w10: U2.62 U2.65 ; U2.69 U2.61 ; U2.72 U2.61 ; U2.67 U2.61 ; v1(1480,55) U3.2 ; U2.70 U2.61 ; R13.2 v1(1720,355)
  Bottom Layer w10: D6.1 1382.8,632.12 1384.69,634.01 1398.7,634.01 1407.48,642.8 C6.1
  other v1: 1865,30 1235,120 738.36,140.86 1250,335 790,435 1425,547.52 890,600 2421.1,623.5 1820,635 2050,760 855,815 1100,905 2421.1,936.5
GPIO0: R8.2 U2.4 | length 277.4
  Top Layer w10: U2.4 1157.28,833.86 1200,791.14 v1(1200,750)
  Bottom Layer w10: v1(1200,750) 1200,854.57 1214.06,868.64 1218.87,868.64 1236.5,886.27 R8.2
GPIO1: U2.5
GPIO2: U2.6
GPIO3: U2.7
GPIO4: U2.8 | length 146
  Top Layer w10: v1(1020,740) 1060,700 U2.8
GPIO5: U2.9 | length 279.8
  Top Layer w10: v1(900,740) 973.46,666.54 U2.9
GPIO6: D15.2 J6.2 U2.10 | length 708
  Top Layer w10: J6.2 505.96,786.58 536.95,755.59 827.84,755.59 932.9,650.54 1066.37,650.54 1083.84,633.07 U2.10
GPIO7: R20.1 U2.11 | length 96.6
  Top Layer w10: R20.1 1060.39,599.61 U2.11
GPIO8: R19.1 U2.12 | length 136.4
  Top Layer w10: R19.1 1048.5,513.73 1100.91,566.14 U2.12
GPIO9: D1.1 U2.13 | length 315.7
  Top Layer w10: U2.13 1157.28,532.68 1199.61,575 1199.61,614.61 v1(1200,615)
  Bottom Layer w10: D1.1 1108.7,523.7 v1(1200,615)
GPIO10: D2.1 U2.14 | length 618.9
  Top Layer w10: U2.14 1157.28,499.21 1240,581.93 1240,640 v1(1200,680)
  Bottom Layer w10: D2.1 1112.4,371.97 1206.99,466.56 1206.99,565.42 1240,598.43 1240,631.57 1200,671.57 v1(1200,680)
GPIO12: U2.16
GPIO13: U2.17
GPIO14: U2.18
GPIO15: U2.19
GPIO16: U2.20
GPIO17: U2.21 U5.3 | length 499.2
  Top Layer w10: U5.3 892.6,377 908,392.4 908,392.56 914.44,399 982.96,399 984.3,397.66 1339.2,397.66 1358.07,416.54 U2.21
GPIO18: U2.22 U5.1 | length 451.9
  Top Layer w10: U5.1 967.4,369 973.4,375 1350,375 1370,395 1391.54,416.54 U2.22
GPIO19: U2.23 U3.6 | length 212.9
  Top Layer w10: U2.23 1425,244.6 1442.6,227 U3.6
GPIO20: U2.24 U3.4 | length 230.1
  Top Layer w10: U2.24 1461.34,421.54 1461.34,293.66 1511.4,243.6 1511.4,224.75 U3.4
GPIO21: U2.25
GPIO26: U2.26 | length 79.6
  Top Layer w10: v1(1525,345) 1525.2,345.2 1525.2,424.21 U2.26
GPIO33: U2.28
GPIO34: U2.29
GPIO35: D12.2 R11.1 SW4.1 U2.31 | length 872.8
  Top Layer w10: U2.31 1708.46,465.75 1760,414.21 1760,236.27 1801.27,195 1828.73,195 1853.73,170 1914.41,170 1945,139.41 D12.2 2099.88,112.8 2117.71,94.96 SW4.1
GPIO36: D11.2 R10.1 SW4.3 U2.32 | length 651
  Top Layer w10: U2.32 1735.94,499.21 1772.46,462.7 1810.8,462.7 R10.1 1876.96,458.5 1880.66,462.2 D11.2 1929.92,462.2 1968.62,423.5 2104.07,423.5 2145.61,465.04 SW4.3
GPIO37: U2.33
GPIO38: D14.2 J5.1 U2.34 | length 711.9
  Top Layer w10: v1(1640,540) 1643.7,540 1669.84,566.14 U2.34
  Bottom Layer w10: v1(1640,540) 1678.31,501.69 1678.31,340.12 1703.44,314.99 1726.63,314.99 1757.93,283.69 1774.19,283.69 1810.08,247.8 1901.93,247.8 1949.73,200 J5.1
GPIO39: U2.35
GPIO40: U2.36
GPIO41: U2.37
GPIO42: U2.38
GPIO43: D8.2 J2.2 U2.39 | length 391.8
  Top Layer w10: U2.39@1708.46,733.46 1761.93,680 1875.59,680 D8.2 1979.43,640.59 1979.43,615.57 J2.2
GPIO44: D7.2 J2.1 U2.40 | length 361.6
  Top Layer w10: U2.40 1708.46,766.93 1775.39,700 D7.2 1919.92,700 1949.92,670 2015,670 J2.1
GPIO45: U2.41
GPIO46: U2.44
GPIO47: U2.27
GPIO48: U2.30
NetC1_2: C1.2 R1.2 R4.2 U1.1 | length 427.7
  Top Layer w10: 408.5,200 411.02,197.48
  Top Layer w20: R4.2 398.5,163.5 408.5,173.5 408.5,200 R1.2 408.99,275.5 408.99,325.87 420,336.88 v1(420,345) ; 411.02,197.48 C1.2
  Bottom Layer w20: v1(420,345) 420,341.34 446.72,314.63 486.73,314.63 494.45,306.91 U1.1
NetC8_2: C8.2 J4.2 U5.5 U6.2 | length 989.9
  Top Layer w10: U6.2 U6.2@150.95,115 ; U5.5 930,223.35 942.52,210.83 C8.2 940.34,197.81 940.34,122.19 J4.2@938.15,120
  Top Layer w20: U6.2@150.95,115 200.95,65 883.15,65 J4.2@938.15,120
NetD1_2: D1.2 R2.1 | length 69.9
  Bottom Layer w10: R2.1 1008.5,445 D1.2
NetD2_2: D2.2 R3.1 | length 82.8
  Bottom Layer w10: R3.1 998.24,370 D2.2
NetD5_2: D5.2 R7.1 | length 78.8
  Top Layer w10: D5.2 1171.97,250 1188.5,266.53 R7.1
NetD10_2: D10.2 R12.1 SW3.1 SW3.2 | length 703.4
  Top Layer w10: R12.1 1818.81,564.69 1955.31,564.69 1996.5,523.5 2074.26,523.5 2105.04,554.29 2105.04,607.13 SW3.1 SW3.2
NetJ3_A5: J3.A5 R16.2 | length 107.9
  Bottom Layer w10: J3.A5 1535.12,275.51 1535.12,299.93 1543.44,308.24 1553.48,308.24 1586.5,341.27 R16.2
NetJ3_A6: J3.A6 J3.B6 U3.3 | length 484.3
  Top Layer w10: v1(1370,105) 1406.5,141.5 1495.56,141.5 1502.63,134.43 1502.63,134.27 1517.4,119.5 U3.3
  Bottom Layer w10: v1(1370,105) 1424.14,105 1470,150.86 1470,235 ; J3.B6 1456.38,273.7 1456.38,248.62 1470,235 ; J3.A6 1493.94,273.7 1493.94,249.28 1479.65,235 1470,235
NetJ3_A7: J3.A7 J3.B7 U3.1 | length 528.1
  Top Layer w10: v1(1365,45) 1372.65,52.65 1392.25,52.65 1442.6,103 U3.1
  Bottom Layer w10: v1(1365,45) 1413.43,45 1466.87,98.44 1475.21,98.44 1521,144.23 1521,216.28 1514.53,222.75 J3.B7 1513.62,275.51 1513.62,299.93 1505.3,308.24 1505.08,308.24 1498.32,315 1490,315 1476.06,301.06 1476.06,291.06 J3.A7@1475,290 ; J3.A7@1474.25,273.7 J3.A7
NetJ3_B5: J3.B5 R15.2 | length 96
  Bottom Layer w10: R15.2 1378.5,341.27 1415.2,304.57 1415.2,275.51 J3.B5
NetJ3_S1: J3.S1 R13.1 | length 73.9
  Top Layer w10: J3.S1 1660,247.05 1691.6,247.05 1697.46,241.19 1697.46,240.31 1706.27,231.5 R13.1
NetJ3_S2: J3.S2 R14.1 | length 85.5
  Top Layer w10: R14.1 1294.38,278.5 1299.54,273.34 1301.35,273.34 1314.92,259.77 J3.S2
NetJ3_S3: J3.S3 R17.1 | length 97.5
  Top Layer w10: J3.S3 1655.08,83.57 1668.65,70 1712.69,70 1721.5,61.19 R17.1@1721.5,50.27
NetJ3_S4: J3.S4 R18.1 | length 98.2
  Top Layer w10: R18.1 1276.11,40 1314.92,78.81 J3.S4
NetJ4_1: J4.1 U5.4 | length 163.2
  Top Layer w10: J4.1 892.6,172.87 U5.4
NetJ4_3: J4.3 U5.6 | length 170.5
  Top Layer w10: U5.6 967.4,188.1 1035.51,120 J4.3
NetJ6_3: J6.3 U7.4 | length 220.2
  Top Layer w10: J6.3 550.75,642.4 U7.4
NetJ6_4: J6.4 U7.6 | length 210.4
  Top Layer w10: J6.4 629.77,589.72 651.9,567.6 U7.6
NetQ1_1: Q1.1 R5.2 | length 72.9
  Bottom Layer w10: Q1.1 1552.87,781.95 1624.55,781.95 R5.2
NetQ2_1: Q2.1 R6.2 | length 285.6
  Bottom Layer w10: Q2.1 1583,947.4 1686.91,843.5 R6.2
NetR1_1: R1.1 U4.1 | length 168.8
  Top Layer w10: U4.1 259.98,370.26 341.5,288.73 R1.1
NetR4_1: R4.1 U6.1 | length 63.6
  Top Layer w10: R4.1@326.5,115 R4.1
  Top Layer w20: U6.1 R4.1@326.5,115
NetR19_2: R19.2 U7.1 | length 195.8
  Top Layer w10: U7.1 822,567.6 889.6,500 R19.2
NetR20_2: R20.2 U7.3 | length 189.8
  Top Layer w10: U7.3 816.15,640 906.57,640 941.57,605 R20.2
RTS_FTDI: D4.2 J1.2 Q1.2 R6.1 | length 468.3
  Bottom Layer w10: Q1.2 1618.61,707.6 1687.51,776.5 R6.1 1760.18,781.69 1791.69,781.69 1835.91,825.91 1853.11,825.91 1856.1,828.9 1968.9,828.9 J1.2
pads on no net: J3.A8 J3.B8

## Polygon pours and split planes (outlines as drawn)
GND on Bottom Layer "GND_L04_P001" (solid, pour order 1): 0,0 0,1003.43 2494.51,998.13 2495,0
GND on Top Layer "GND_L01_P000" (solid, pour order 0): 0,0 0,1003.43 2494.51,998.13 2495,0
3.3V on 3.3V (split plane): 2474.43,978.08 2474.89,20.1 20.1,20.1 20.1,983.29
GND on GND (split plane): 2474.43,978.08 2474.89,20.1 20.1,20.1 20.1,983.29

## Text inside footprints (layer, text, board x,y; h text height)
U3: Top 3D Body "*" at 1473,133 h50 r90
U5: Top 3D Body "*" at 937,347 h50 r270
U7: Top 3D Body "*" at 792,598 h50 r180